# Altium PCB PCB_Testplatine - GND mit Tracks.PcbDoc (part 1 of 4)
Units mm, origin at the board's own origin, x right, y up, seen from the top; angles counter-clockwise.
Board outline 124.77 x 137.35 mm, 2 copper layers (Top Layer, Bottom Layer); 214 components, 181 nets, 1100 pads, 464 vias.
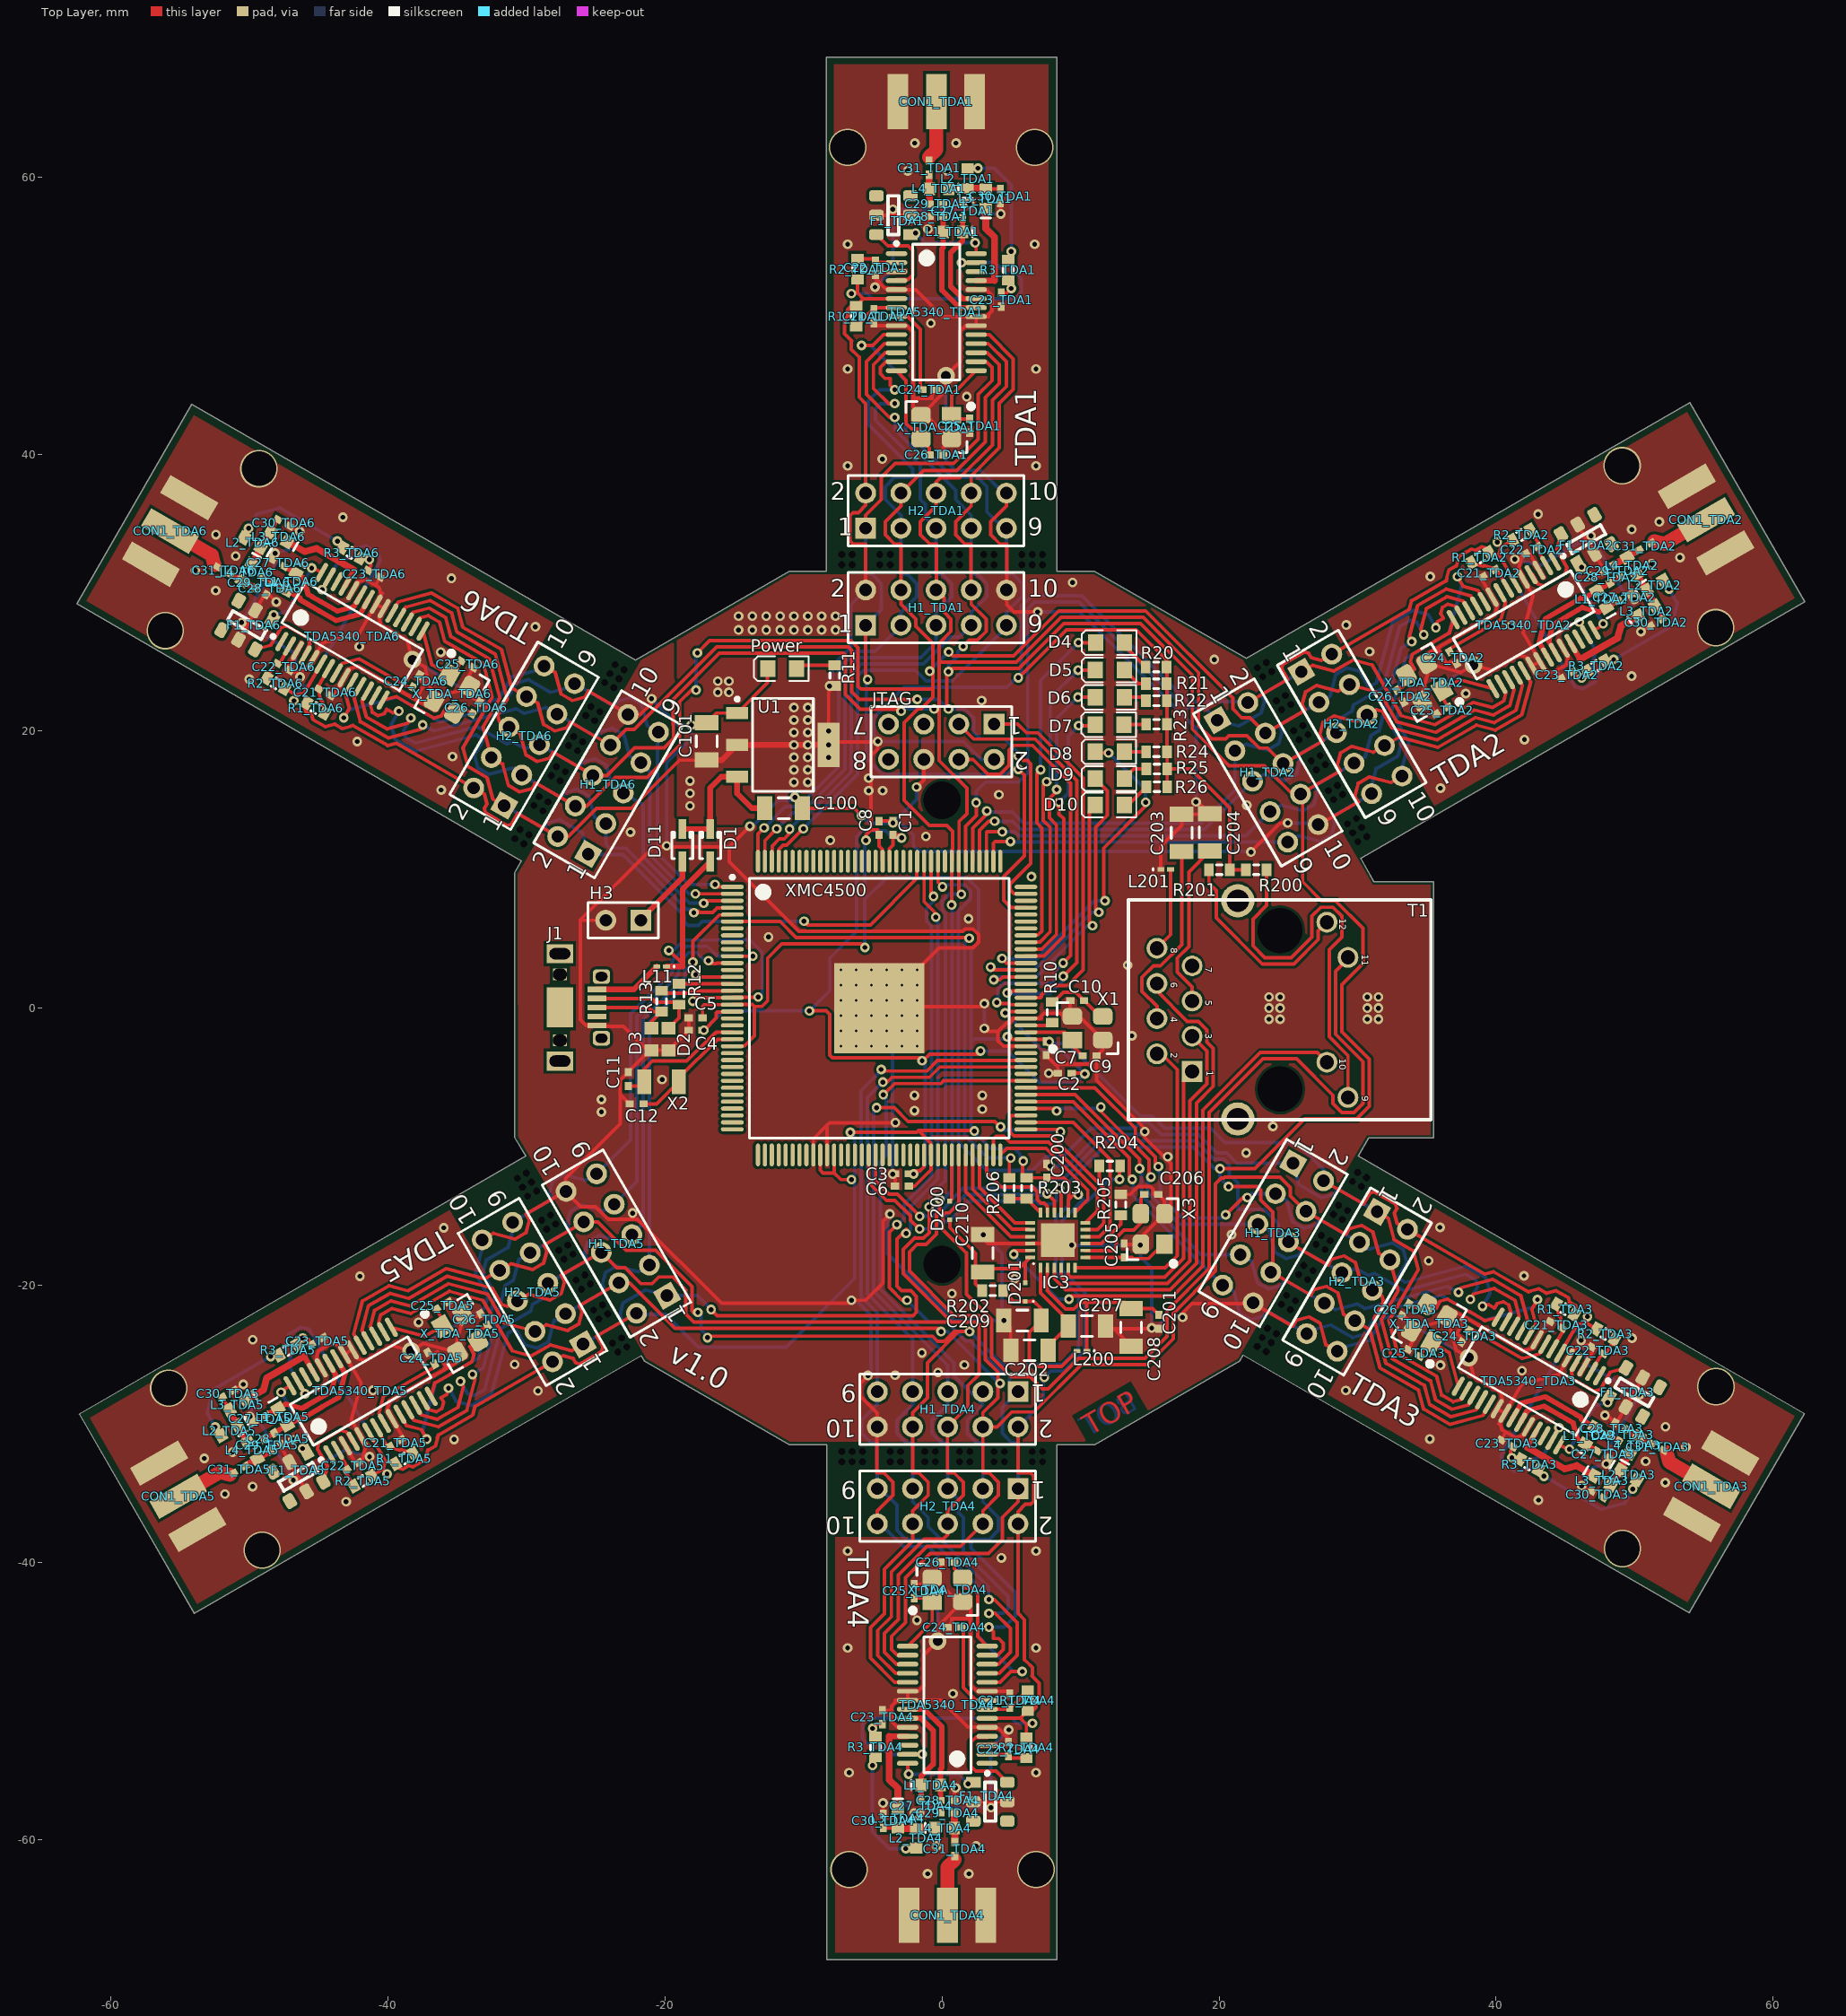
[diagram p0: Top Layer view]
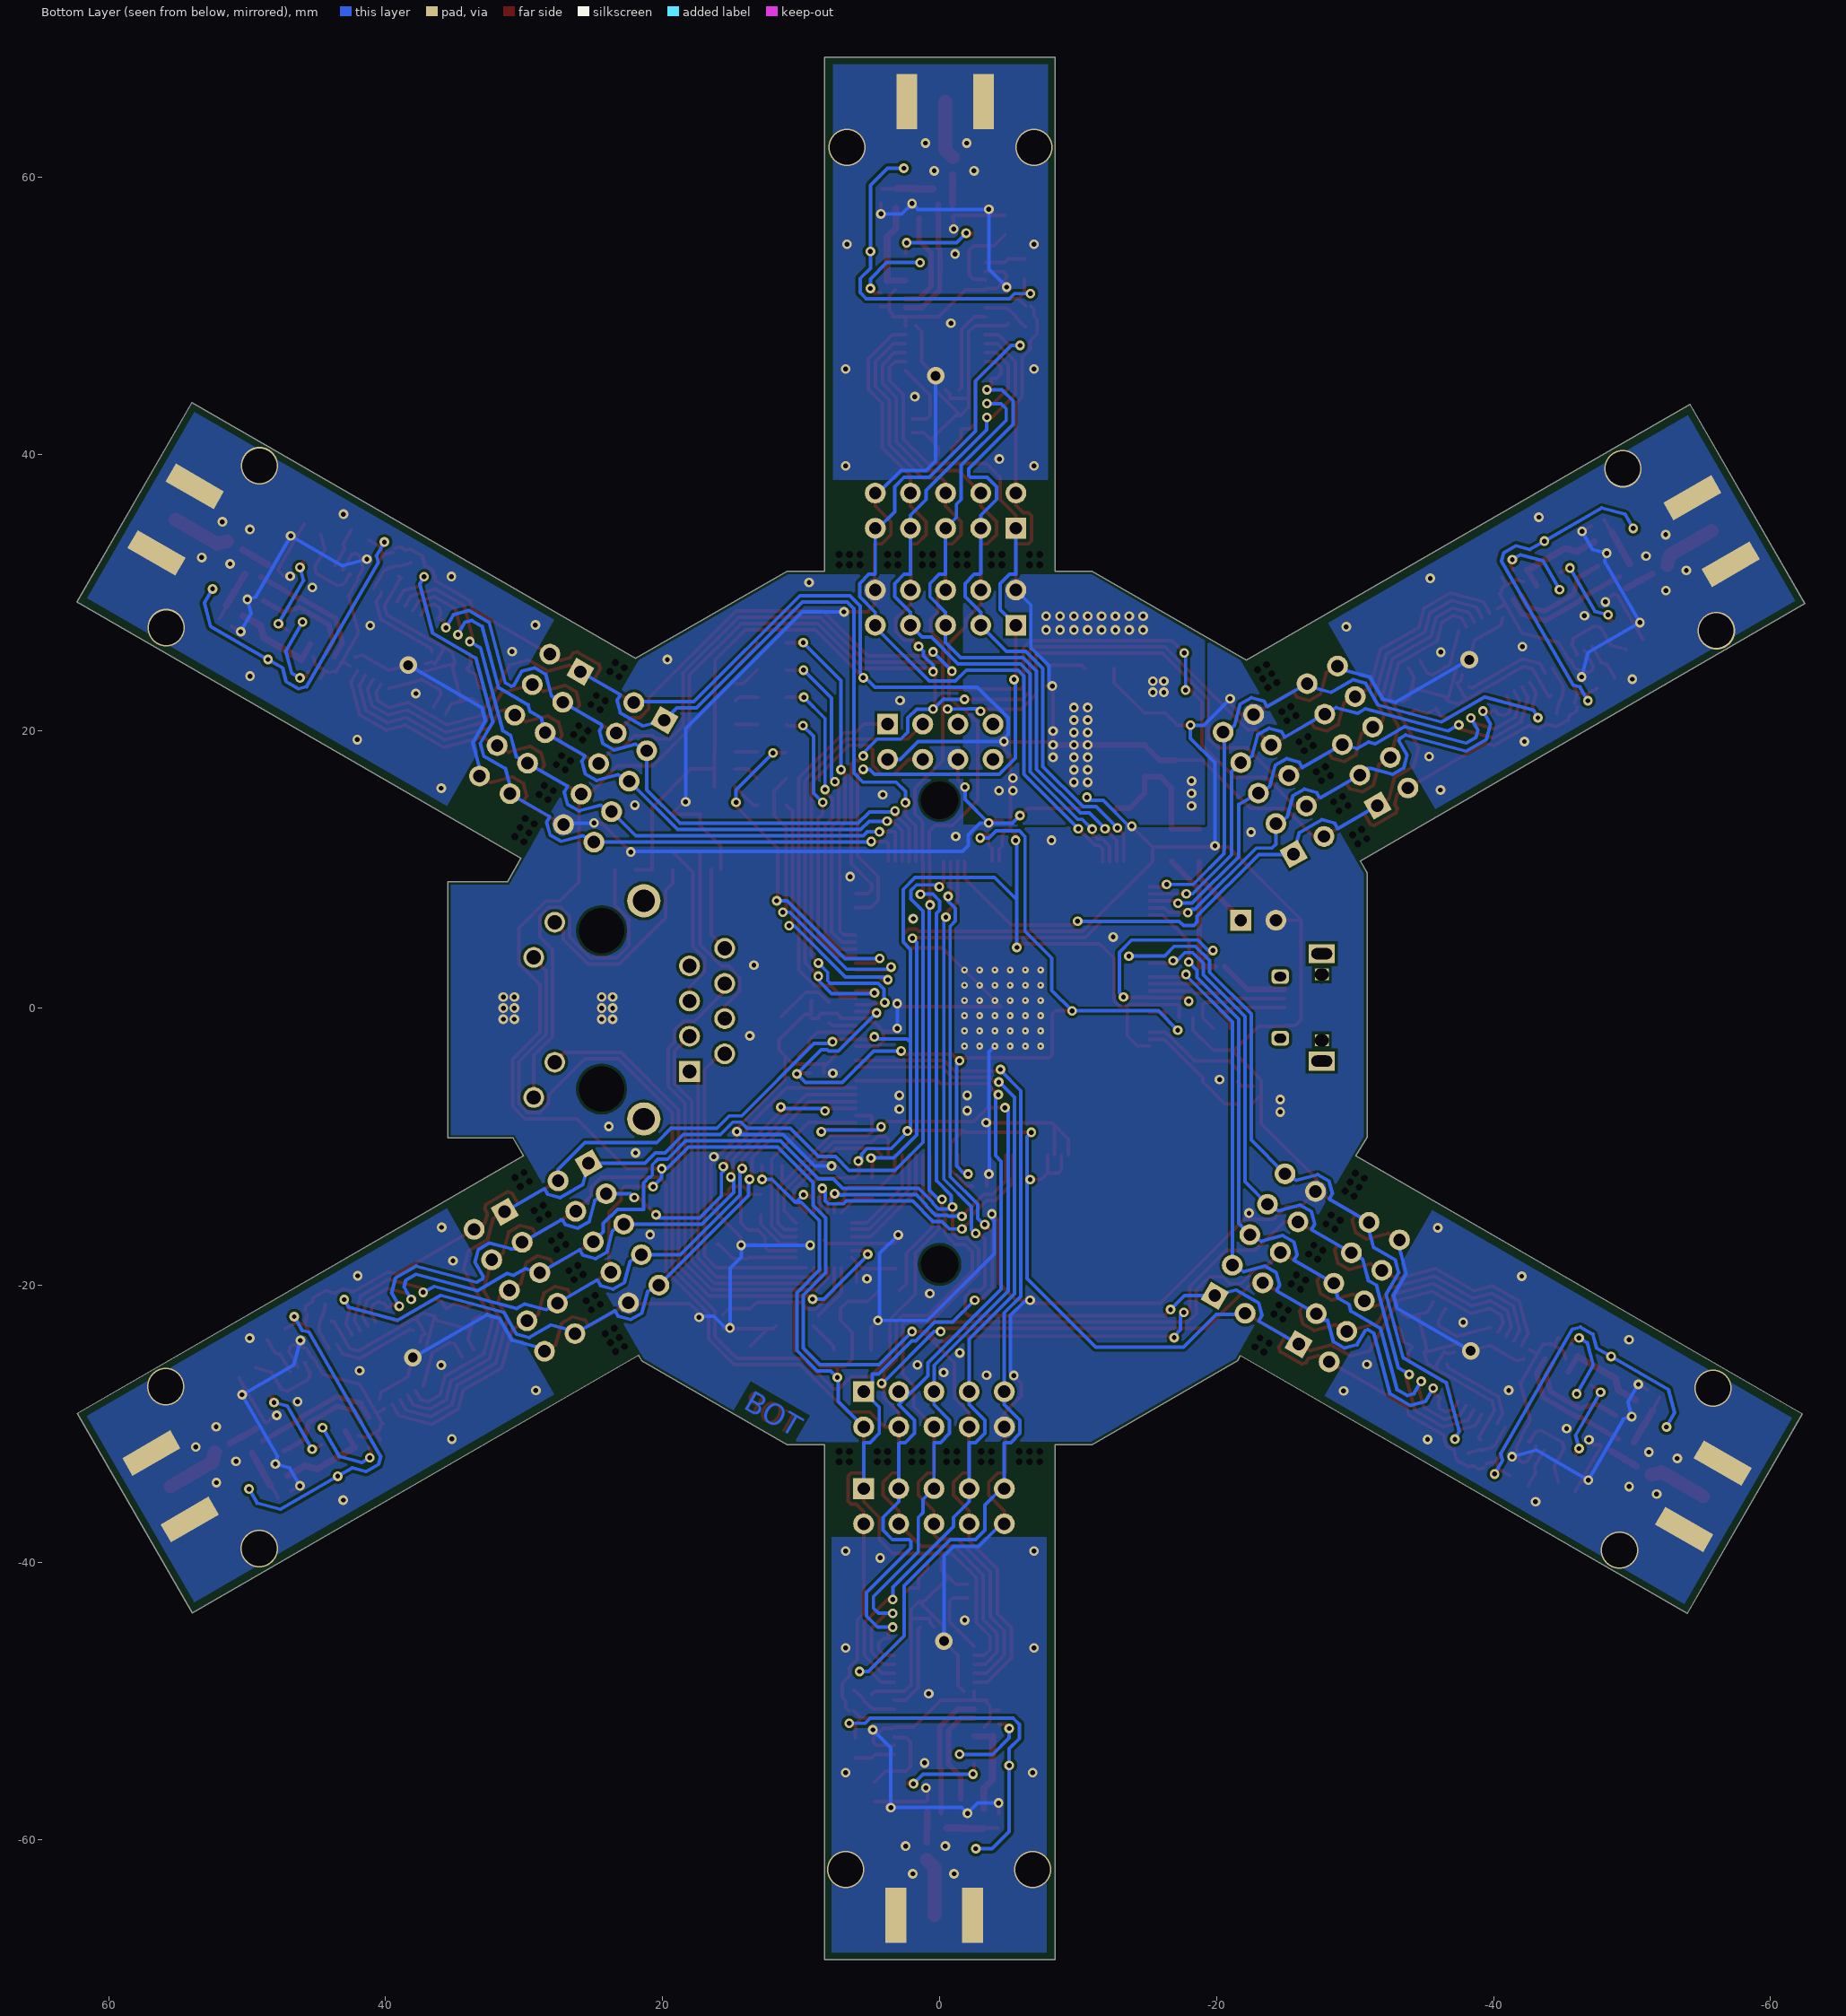
[diagram p1: Bottom Layer view, seen from below]

## Layer stack, top to bottom
Top Solder: solder mask 0.0102, Solder Resist, Dk 3.5
Top Layer: signal copper 0.0356
Dielectric1: dielectric 0.32, FR-4, Dk 4.8
Bottom Layer: signal copper 0.0356
Bottom Solder: solder mask 0.0102, Solder Resist, Dk 3.5

## Board outline
-8.33,-68.7 8.29,-68.7 8.29,-31.51 8.31,-31.51 11.02,-31.51 21.5,-25.46 21.73,-25.06 53.95,-43.66 62.26,-29.27 30.04,-10.67 30.79,-9.37 35.49,-9.37 35.49,9.12 35.01,9.12 31.19,9.12 30.22,10.81 62.29,29.33 53.98,43.72 21.95,25.25 11,31.53 8.29,31.53 8.29,68.65 8.04,68.65 -8.35,68.65 -8.35,31.55 -8.35,31.53 -11.02,31.53 -22.15,25.11 -54.18,43.59 -62.48,29.19 -30.38,10.62 -30.88,9.75 -30.88,-9.32 -30.05,-10.67 -62.3,-29.3 -53.99,-43.7 -21.73,-25.09 -21.52,-25.46 -11.02,-31.51 -8.33,-31.51

## Design rules (kind name [scope] priority, off if disabled: settings)
BoardOutlineClearance [All] p1: gap=0.2
Clearance [All] p1: gap=0.2
DiffPairsRouting [All] p1: maxlimit=0.254 minlimit=0.254 mostfreqgap=0.254 toplayer_minwidth=0.381 toplayer_maxwidth=0.381 toplayer_prefwidth=0.381 bottomlayer_minwidth=0.381 bottomlayer_maxwidth=0.381 bottomlayer_prefwidth=0.381 maxuncoupledlength=12.7
FabricationTestPointUsage TestPointUsage [All] p1: valid=0 allowmultiple=FALSE
FabricationTestpoint Testpoint [All] p1: side=3 testpointundercomponent=TRUE minsize=1.016 maxsize=2.54 preferedsize=1.524 minholesize=0 maxholesize=1.016 preferedholesize=0.813 testpointgrid=0.025 allowsidetop=TRUE allowsidebottom=TRUE usegrid=TRUE gridtolerance=0
HoleSize [All] p1: absolutevalues=TRUE maxlimit=3.5 minlimit=0.025 maxpercent=80.000 minpercent=20.000
PolygonConnect [isVia] p1: connectstyle=Direct reliefconductorwidth=0.254 reliefentries=4 polygonreliefangle="90 Angle" airgapwidth=0.254
PolygonConnect PolygonConnect_1 [All] p2: connectstyle=Relief reliefconductorwidth=0.254 reliefentries=4 polygonreliefangle="90 Angle" airgapwidth=0.12
RoomDefinition TDA6 [InComponentClass('TDA6')] p1: confinementstyle=ConfineIn formatcopy=TRUE lockcomponents=FALSE outline -25.661,7.946 -17.361,22.322 -54.167,43.572 -62.467,29.196
RoomDefinition TDA5 [InComponentClass('TDA5')] p2: confinementstyle=ConfineIn formatcopy=TRUE lockcomponents=FALSE outline -17.171,-22.435 -25.471,-8.059 -62.277,-29.309 -53.977,-43.685
RoomDefinition TDA4 [InComponentClass('TDA4')] p3: confinementstyle=ConfineIn formatcopy=TRUE lockcomponents=FALSE outline 8.28,-26.19 -8.32,-26.19 -8.32,-68.69 8.28,-68.69
RoomDefinition TDA3 [InComponentClass('TDA3')] p4: confinementstyle=ConfineIn formatcopy=TRUE lockcomponents=FALSE outline 25.441,-8.026 17.141,-22.402 53.947,-43.652 62.247,-29.276
RoomDefinition TDA2 [InComponentClass('TDA2')] p5: confinementstyle=ConfineIn formatcopy=TRUE lockcomponents=FALSE outline 17.171,22.454 25.471,8.078 62.277,29.328 53.977,43.704
RoomDefinition TDA1 [InComponentClass('TDA1')] p6: confinementstyle=ConfineIn formatcopy=TRUE lockcomponents=FALSE outline -8.32,26.14 8.28,26.14 8.28,68.64 -8.32,68.64
RoutingVias [All] p1: holewidth=0.35 width=0.7 viastyle="Through Hole" minholewidth=0.35 minwidth=0.7 maxholewidth=0.711 maxwidth=1.27
SilkToSolderMaskClearance SilkscreenOverComponentPads [IsPad] p1: minsilkscreentomaskgap=0.254 clearancetoexposedcopper=TRUE
SolderMaskExpansion [All] p1: expansion=0.102
Width [All] p1: maxlimit=1 minlimit=0.254 preferedwidth=0.254
25 further rules are at their usual default settings.

## Classes and differential pairs
component class TDA1: C21_TDA1 C22_TDA1 C23_TDA1 C24_TDA1 C25_TDA1 C26_TDA1 C27_TDA1 C28_TDA1 C29_TDA1 C30_TDA1 C31_TDA1 CON1_TDA1 F1_TDA1 H1_TDA1 H2_TDA1 L1_TDA1 L2_TDA1 L3_TDA1 L4_TDA1 R1_TDA1 R2_TDA1 R3_TDA1 TDA5340_TDA1 X_TDA_TDA1
component class TDA2: C21_TDA2 C22_TDA2 C23_TDA2 C24_TDA2 C25_TDA2 C26_TDA2 C27_TDA2 C28_TDA2 C29_TDA2 C30_TDA2 C31_TDA2 CON1_TDA2 F1_TDA2 H1_TDA2 H2_TDA2 L1_TDA2 L2_TDA2 L3_TDA2 L4_TDA2 R1_TDA2 R2_TDA2 R3_TDA2 TDA5340_TDA2 X_TDA_TDA2
component class TDA3: C21_TDA3 C22_TDA3 C23_TDA3 C24_TDA3 C25_TDA3 C26_TDA3 C27_TDA3 C28_TDA3 C29_TDA3 C30_TDA3 C31_TDA3 CON1_TDA3 F1_TDA3 H1_TDA3 H2_TDA3 L1_TDA3 L2_TDA3 L3_TDA3 L4_TDA3 R1_TDA3 R2_TDA3 R3_TDA3 TDA5340_TDA3 X_TDA_TDA3
component class TDA4: C21_TDA4 C22_TDA4 C23_TDA4 C24_TDA4 C25_TDA4 C26_TDA4 C27_TDA4 C28_TDA4 C29_TDA4 C30_TDA4 C31_TDA4 CON1_TDA4 F1_TDA4 H1_TDA4 H2_TDA4 L1_TDA4 L2_TDA4 L3_TDA4 L4_TDA4 R1_TDA4 R2_TDA4 R3_TDA4 TDA5340_TDA4 X_TDA_TDA4
component class TDA5: C21_TDA5 C22_TDA5 C23_TDA5 C24_TDA5 C25_TDA5 C26_TDA5 C27_TDA5 C28_TDA5 C29_TDA5 C30_TDA5 C31_TDA5 CON1_TDA5 F1_TDA5 H1_TDA5 H2_TDA5 L1_TDA5 L2_TDA5 L3_TDA5 L4_TDA5 R1_TDA5 R2_TDA5 R3_TDA5 TDA5340_TDA5 X_TDA_TDA5
component class TDA6: C21_TDA6 C22_TDA6 C23_TDA6 C24_TDA6 C25_TDA6 C26_TDA6 C27_TDA6 C28_TDA6 C29_TDA6 C30_TDA6 C31_TDA6 CON1_TDA6 F1_TDA6 H1_TDA6 H2_TDA6 L1_TDA6 L2_TDA6 L3_TDA6 L4_TDA6 R1_TDA6 R2_TDA6 R3_TDA6 TDA5340_TDA6 X_TDA_TDA6
component class U_Ethernet: C200 C201 C202 C203 C204 C205 C206 C207 C208 C209 C210 D200 D201 IC3 L200 L201 R200 R201 R202 R203 R204 R205 R206 T1 X3
component class "U_Power Supply": C1 C2 C3 C4 C5 C6 C7 C8 C9 C10 C11 C12 C100 C101 D1 D2 D3 D11 H3 J1 JTAG L11 Power R10 R11 R12 R13 U1 X1 X2
component class U_XMC4500: D4 D5 D6 D7 D8 D9 D10 R20 R21 R22 R23 R24 R25 R26 XMC4500
net class P_ON[1..6]: P_ON1 P_ON2 P_ON3 P_ON4 P_ON5 P_ON6
net class SELECT[1..6]: SELECT1 SELECT2 SELECT3 SELECT4 SELECT5 SELECT6
channel class TDA5340: TDA1 TDA2 TDA3 TDA4 TDA5 TDA6
differential pair RX_TDA6: +RX_TDA6_P -RX_TDA6_N
differential pair RX_TDA5: +RX_TDA5_P -RX_TDA5_N
differential pair RX_TDA4: +RX_TDA4_P -RX_TDA4_N
differential pair RX_TDA3: +RX_TDA3_P -RX_TDA3_N
differential pair RX_TDA2: +RX_TDA2_P -RX_TDA2_N
differential pair RX_TDA1: +RX_TDA1_P -RX_TDA1_N

## Components (designator, comment, footprint, x,y, rotation, side; value= is the part's Value field where it differs from the comment)
C1 "Cap Semi" 0402 -3.55,13 r270 top
C2 "Cap Semi" 0402 8.85,-4.7 r0 top
C3 "Cap Semi" 0402 -2.9,-11.95 r0 top
C4 "Cap Semi" 0402 -17.8,-1.6 r0 top
C5 "Cap Semi" 0402 -17.8,-0.7 r0 top
C6 "Cap Semi" 0402 -2.9,-12.85 r0 top
C7 "Cap Semi" 0402 7.5,-2.9 r90 top
C8 "Cap Semi" 0402 -4.55,13 r270 top
C9 "Cap Semi" 0402 10.65,-3.45 r180 top
C10 "Cap Semi" 0402 9.75,0.55 r0 top
C11 "Cap Semi" 0402 -22.66,-5.13 r270 top
C12 "Cap Semi" 0402 -22.06,-6.91 r0 top
C21_TDA1 "Cap Semi" 0402 -4.92,49.94 r270 top (schematic designator C21)
C21_TDA2 "Cap Semi" 0402 39.483,31.409 r210 top (schematic designator C21)
C21_TDA3 "Cap Semi" 0402 44.352,-22.871 r150 top (schematic designator C21)
C21_TDA4 "Cap Semi" 0402 4.88,-49.99 r90 top (schematic designator C21)
C21_TDA5 "Cap Semi" 0402 -39.482,-31.39 r30 top (schematic designator C21)
C21_TDA6 "Cap Semi" 0402 -44.572,22.791 r330 top (schematic designator C21)
C22_TDA1 "Cap Semi" 0402 -4.82,53.44 r270 top (schematic designator C22)
C22_TDA2 "Cap Semi" 0402 42.564,33.073 r210 top (schematic designator C22)
C22_TDA3 "Cap Semi" 0402 47.333,-24.707 r150 top (schematic designator C22)
C22_TDA4 "Cap Semi" 0402 4.78,-53.49 r90 top (schematic designator C22)
C22_TDA5 "Cap Semi" 0402 -42.563,-33.054 r30 top (schematic designator C22)
C22_TDA6 "Cap Semi" 0402 -47.553,24.627 r330 top (schematic designator C22)
C23_TDA1 "Cap Semi" 0402 4.27,51.14 r270 top (schematic designator C23)
C23_TDA2 "Cap Semi" 0402 45.117,24.05 r210 top (schematic designator C23)
C23_TDA3 "Cap Semi" 0402 40.797,-31.43 r150 top (schematic designator C23)
C23_TDA4 "Cap Semi" 0402 -4.31,-51.19 r90 top (schematic designator C23)
C23_TDA5 "Cap Semi" 0402 -45.117,-24.032 r30 top (schematic designator C23)
C23_TDA6 "Cap Semi" 0402 -41.017,31.35 r330 top (schematic designator C23)
C24_TDA1 "Cap Semi" 0402 -0.92,44.64 r0 top (schematic designator C24)
C24_TDA2 "Cap Semi" 0402 36.893,25.295 r300 top (schematic designator C24)
C24_TDA3 "Cap Semi" 0402 37.762,-23.685 r240 top (schematic designator C24)
C24_TDA4 "Cap Semi" 0402 0.88,-44.69 r180 top (schematic designator C24)
C24_TDA5 "Cap Semi" 0402 -36.892,-25.276 r120 top (schematic designator C24)
C24_TDA6 "Cap Semi" 0402 -37.982,23.605 r60 top (schematic designator C24)
C25_TDA1 "Cap Semi" 0402 1.98,42.04 r270 top (schematic designator C25)
C25_TDA2 "Cap Semi" 0402 36.091,21.484 r210 top (schematic designator C25)
C25_TDA3 "Cap Semi" 0402 34.061,-24.896 r150 top (schematic designator C25)
C25_TDA4 "Cap Semi" 0402 -2.02,-42.09 r90 top (schematic designator C25)
C25_TDA5 "Cap Semi" 0402 -36.091,-21.465 r30 top (schematic designator C25)
C25_TDA6 "Cap Semi" 0402 -34.281,24.816 r330 top (schematic designator C25)
C26_TDA1 "Cap Semi" 0402 -0.42,39.94 r180 top (schematic designator C26)
C26_TDA2 "Cap Semi" 0402 33.072,22.512 r120 top (schematic designator C26)
C26_TDA3 "Cap Semi" 0402 33.442,-21.768 r60 top (schematic designator C26)
C26_TDA4 "Cap Semi" 0402 0.38,-39.99 r0 top (schematic designator C26)
C26_TDA5 "Cap Semi" 0402 -33.072,-22.493 r300 top (schematic designator C26)
C26_TDA6 "Cap Semi" 0402 -33.662,21.688 r240 top (schematic designator C26)
C27_TDA1 "Cap Semi" 0402 1.48,57.54 r270 top (schematic designator C27)
C27_TDA2 "Cap Semi" 0402 49.264,29.667 r210 top (schematic designator C27)
C27_TDA3 "Cap Semi" 0402 47.734,-32.213 r150 top (schematic designator C27)
C27_TDA4 "Cap Semi" 0402 -1.52,-57.59 r90 top (schematic designator C27)
C27_TDA5 "Cap Semi" 0402 -49.264,-29.648 r30 top (schematic designator C27)
C27_TDA6 "Cap Semi" 0402 -47.954,32.133 r330 top (schematic designator C27)
C28_TDA1 "Cap Semi" 0402 -0.42,57.14 r180 top (schematic designator C28)
C28_TDA2 "Cap Semi" 0402 47.968,31.112 r120 top (schematic designator C28)
C28_TDA3 "Cap Semi" 0402 48.338,-30.368 r60 top (schematic designator C28)
C28_TDA4 "Cap Semi" 0402 0.38,-57.19 r0 top (schematic designator C28)
C28_TDA5 "Cap Semi" 0402 -47.968,-31.093 r300 top (schematic designator C28)
C28_TDA6 "Cap Semi" 0402 -48.558,30.288 r240 top (schematic designator C28)
C29_TDA1 "Cap Semi" 0402 -0.42,58.04 r0 top (schematic designator C29)
C29_TDA2 "Cap Semi" 0402 48.747,31.562 r300 top (schematic designator C29)
C29_TDA3 "Cap Semi" 0402 49.117,-30.818 r240 top (schematic designator C29)
C29_TDA4 "Cap Semi" 0402 0.38,-58.09 r180 top (schematic designator C29)
C29_TDA5 "Cap Semi" 0402 -48.747,-31.543 r120 top (schematic designator C29)
C29_TDA6 "Cap Semi" 0402 -49.337,30.738 r60 top (schematic designator C29)
C30_TDA1 "Cap Semi" 0402 4.2,58.62 r90 top (schematic designator C30)
C30_TDA2 "Cap Semi" 0402 51.56,27.851 r30 top (schematic designator C30)
C30_TDA3 "Cap Semi" 0402 47.309,-35.109 r330 top (schematic designator C30)
C30_TDA4 "Cap Semi" 0402 -4.24,-58.67 r270 top (schematic designator C30)
C30_TDA5 "Cap Semi" 0402 -51.559,-27.832 r210 top (schematic designator C30)
C30_TDA6 "Cap Semi" 0402 -47.529,35.029 r150 top (schematic designator C30)
C31_TDA1 "Cap Semi" 0402 -0.95,60.66 r90 top (schematic designator C31)
C31_TDA2 "Cap Semi" 0402 50.751,33.331 r30 top (schematic designator C31)
C31_TDA3 "Cap Semi" 0402 51.651,-31.669 r330 top (schematic designator C31)
C31_TDA4 "Cap Semi" 0402 0.91,-60.71 r270 top (schematic designator C31)
C31_TDA5 "Cap Semi" 0402 -50.751,-33.312 r210 top (schematic designator C31)
C31_TDA6 "Cap Semi" 0402 -51.871,31.589 r150 top (schematic designator C31)
C100 "Cap Semi" C1206 -11.45,14.43 r180 top
C101 "Cap Semi" C1206 -17,19.25 r270 top
C200 "Cap Semi" 0402 7.55,-11.75 r270 top
C201 "Cap Semi" 0402 15.65,-22.65 r90 top
C202 "Cap Semi" C1206 6.3,-24.7 r0 top
C203 "Cap Semi" C1206 17.29,12.66 r270 top
C204 "Cap Semi" C1206 19.32,12.68 r270 top
C205 "Cap Semi" 0402 13.15,-17.5 r270 top
C206 "Cap Semi" 0402 15.1,-13.45 r180 top
C207 "Cap Semi" C1206 10.45,-22.95 r180 top
C208 "Cap Semi" C1206 13.65,-23.05 r90 top
C209 "Cap Semi" C1206 5.8,-22.55 r0 top
C210 "Cap Semi" C1206 2.93,-17.7 r270 top
CON1_TDA1 "SMA" SMA -0.42,63.44 r0 top (schematic designator CON1)
CON1_TDA2 "SMA" SMA 53.424,34.262 r300 top (schematic designator CON1)
CON1_TDA3 "SMA" SMA 53.794,-33.518 r240 top (schematic designator CON1)
CON1_TDA4 "SMA" SMA 0.38,-63.49 r180 top (schematic designator CON1)
CON1_TDA5 "SMA" SMA -53.424,-34.243 r120 top (schematic designator CON1)
CON1_TDA6 "SMA" SMA -54.014,33.438 r60 top (schematic designator CON1)
D1 "BAT60A" SOD-323 -16.75,11.75 r90 top
D2 "82356050560" WE-VE_0603 -19.75,-2.25 r90 top
D3 "82356050560" WE-VE_0603 -21,-2.25 r90 top
D4 "Green" LED_0805_Green 12.12,26.38 r180 top
D5 "Green" LED_0805_Green 12.11,24.42 r180 top
D6 "Green" LED_0805_Green 12.1,22.44 r180 top
D7 "Green" LED_0805_Green 12.09,20.47 r180 top
D8 "Red" LED_0805_Red 12.1,18.5 r180 top
D9 "Red" LED_0805_Red 12.11,16.57 r180 top
D10 "Red" LED_0805_Red 12.11,14.65 r180 top
D11 "BAT60A" SOD-323 -18.76,11.75 r90 top
D200 "BAT54-02V" INF-SC79_V 0.55,-14.6 r270 top
D201 "BAT54-02V" INF-SC79_V 6,-20.5 r90 top
F1_TDA1 "SFECF10M7EA00" SOP6 -3.52,57.24 r180 top (schematic designator F1)
F1_TDA2 "SFECF10M7EA00" SOP6 46.505,33.847 r120 top (schematic designator F1)
F1_TDA3 "SFECF10M7EA00" SOP6 49.974,-27.733 r60 top (schematic designator F1)
F1_TDA4 "SFECF10M7EA00" SOP6 3.48,-57.29 r0 top (schematic designator F1)
F1_TDA5 "SFECF10M7EA00" SOP6 -46.504,-33.828 r300 top (schematic designator F1)
F1_TDA6 "SFECF10M7EA00" SOP6 -50.194,27.653 r240 top (schematic designator F1)
H1_TDA1 "Header 5X2" HDR2X5 -5.52,27.64 r0 top (schematic designator H1)
H1_TDA2 "Header 5X2" HDR2X5 19.87,20.779 r300 top (schematic designator H1)
H1_TDA3 "Header 5X2" HDR2X5 25.34,-11.201 r240 top (schematic designator H1)
H1_TDA4 "Header 5X2" HDR2X5 5.48,-27.69 r180 top (schematic designator H1)
H1_TDA5 "Header 5X2" HDR2X5 -19.87,-20.76 r120 top (schematic designator H1)
H1_TDA6 "Header 5X2" HDR2X5 -25.56,11.121 r60 top (schematic designator H1)
H2_TDA1 "Header 5X2" HDR2X5 -5.52,34.64 r0 top (schematic designator H2)
H2_TDA2 "Header 5X2" HDR2X5 25.932,24.279 r300 top (schematic designator H2)
H2_TDA3 "Header 5X2" HDR2X5 31.402,-14.701 r240 top (schematic designator H2)
H2_TDA4 "Header 5X2" HDR2X5 5.48,-34.69 r180 top (schematic designator H2)
H2_TDA5 "Header 5X2" HDR2X5 -25.932,-24.26 r120 top (schematic designator H2)
H2_TDA6 "Header 5X2" HDR2X5 -31.622,14.621 r60 top (schematic designator H2)
H3 "Header 2" HDR1X2 -21.75,6.34 r180 top
IC3 "KSZ8031RNL" "QFN /MLF 24pin" 10.35,-18.75 r90 top
J1 "Micro USB Buchse" "Micro USB Buchse - Molex" -27.6,0.05 r0 top
JTAG "Header 4X2" HDR2X4 3.75,20.5 r180 top
L1_TDA1 "Inductor" INDC1608L 0.78,56.04 r180 top (schematic designator L1)
L1_TDA2 "Inductor" INDC1608L 47.615,29.523 r120 top (schematic designator L1)
L1_TDA3 "Inductor" INDC1608L 46.785,-30.857 r60 top (schematic designator L1)
L1_TDA4 "Inductor" INDC1608L -0.82,-56.09 r0 top (schematic designator L1)
L1_TDA5 "Inductor" INDC1608L -47.615,-29.504 r300 top (schematic designator L1)
L1_TDA6 "Inductor" INDC1608L -47.005,30.777 r240 top (schematic designator L1)
L2_TDA1 "Inductor" INDC1608L 1.84,59.87 r90 top (schematic designator L2)
L2_TDA2 "Inductor" INDC1608L 51.462,30.52 r30 top (schematic designator L2)
L2_TDA3 "Inductor" INDC1608L 49.572,-33.69 r330 top (schematic designator L2)
L2_TDA4 "Inductor" INDC1608L -1.88,-59.92 r270 top (schematic designator L2)
L2_TDA5 "Inductor" INDC1608L -51.462,-30.501 r210 top (schematic designator L2)
L2_TDA6 "Inductor" INDC1608L -49.792,33.61 r150 top (schematic designator L2)
L3_TDA1 "Inductor" INDC1608L 3.15,58.43 r90 top (schematic designator L3)
L3_TDA2 "Inductor" INDC1608L 50.87,28.665 r30 top (schematic designator L3)
L3_TDA3 "Inductor" INDC1608L 47.67,-34.105 r330 top (schematic designator L3)
L3_TDA4 "Inductor" INDC1608L -3.19,-58.48 r270 top (schematic designator L3)
L3_TDA5 "Inductor" INDC1608L -50.87,-28.647 r210 top (schematic designator L3)
L3_TDA6 "Inductor" INDC1608L -47.89,34.025 r150 top (schematic designator L3)
L4_TDA1 "Inductor" INDC1608L -0.22,59.14 r180 top (schematic designator L4)
L4_TDA2 "Inductor" INDC1608L 49.8,31.939 r120 top (schematic designator L4)
L4_TDA3 "Inductor" INDC1608L 49.97,-31.541 r60 top (schematic designator L4)
L4_TDA4 "Inductor" INDC1608L 0.18,-59.19 r0 top (schematic designator L4)
L4_TDA5 "Inductor" INDC1608L -49.8,-31.92 r300 top (schematic designator L4)
L4_TDA6 "Inductor" INDC1608L -50.19,31.461 r240 top (schematic designator L4)
L11 "Inductor" 0603 -20.25,3 r180 top
L200 "Inductor" 0603 10.1,-24.75 r180 top
L201 "Inductor" 0603 16.14,10.01 r0 top
Power "Red" LED_0805_Red -11.55,24.5 r180 top
R1_TDA1 "Res3" J1-0603 -6.22,49.94 r90 top (schematic designator R1)
R1_TDA2 "Res3" J1-0603 38.833,32.535 r30 top (schematic designator R1)
R1_TDA3 "Res3" J1-0603 45.002,-21.745 r330 top (schematic designator R1)
R1_TDA4 "Res3" J1-0603 6.18,-49.99 r270 top (schematic designator R1)
R1_TDA5 "Res3" J1-0603 -38.832,-32.516 r210 top (schematic designator R1)
R1_TDA6 "Res3" J1-0603 -45.222,21.665 r150 top (schematic designator R1)
R2_TDA1 "Res3" J1-0603 -6.12,53.34 r270 top (schematic designator R2)
R2_TDA2 "Res3" J1-0603 41.827,34.148 r210 top (schematic designator R2)
R2_TDA3 "Res3" J1-0603 47.897,-23.532 r150 top (schematic designator R2)
R2_TDA4 "Res3" J1-0603 6.08,-53.39 r90 top (schematic designator R2)
R2_TDA5 "Res3" J1-0603 -41.827,-34.13 r30 top (schematic designator R2)
R2_TDA6 "Res3" J1-0603 -48.117,23.452 r330 top (schematic designator R2)
R3_TDA1 "Res3" J1-0603 4.77,53.29 r90 top (schematic designator R3)
R3_TDA2 "Res3" J1-0603 47.229,24.692 r30 top (schematic designator R3)
R3_TDA3 "Res3" J1-0603 42.409,-32.938 r330 top (schematic designator R3)
R3_TDA4 "Res3" J1-0603 -4.81,-53.34 r270 top (schematic designator R3)
R3_TDA5 "Res3" J1-0603 -47.229,-24.674 r210 top (schematic designator R3)
R3_TDA6 "Res3" J1-0603 -42.629,32.858 r150 top (schematic designator R3)
R10 "Res3" J1-0603 7.95,-0.3 r90 top
R11 "Res3" J1-0603 -7.75,24 r270 top
R12 "Res3" J1-0603 -19,1 r270 top
R13 "Res3" J1-0603 -20.25,0.5 r270 top
R20 "Res3" J1-0603 15.45,24.63 r0 top
R21 "Res3" J1-0603 15.46,23.41 r0 top
R22 "Res3" J1-0603 15.47,22.19 r0 top
R23 "Res3" J1-0603 15.48,20.49 r0 top
R24 "Res3" J1-0603 15.48,18.51 r0 top
R25 "Res3" J1-0603 15.5,17.26 r0 top
R26 "Res3" J1-0603 15.5,15.98 r0 top
R200 "Res3" J1-0603 22.68,9.99 r180 top
R201 "Res3" J1-0603 20.01,9.99 r0 top
R202 "Res3" J1-0603 3.65,-20.4 r0 top
R203 "Res3" J1-0603 6.1,-13 r90 top
R204 "Res3" J1-0603 12.1,-11.4 r0 top
R205 "Res3" J1-0603 12.9,-14.2 r270 top
R206 "Res3" J1-0603 4.85,-13 r90 top
T1 "7499010211A" 7499010211A 24.4,-0.125 r270 top
TDA5340_TDA1 "TDA5340" INF-PG-TSSOP-28_N -0.42,50.24 r0 top (schematic designator TDA5340)
TDA5340_TDA2 "TDA5340" INF-PG-TSSOP-28_N 41.992,27.662 r300 top (schematic designator TDA5340)
TDA5340_TDA3 "TDA5340" INF-PG-TSSOP-28_N 42.362,-26.918 r240 top (schematic designator TDA5340)
TDA5340_TDA4 "TDA5340" INF-PG-TSSOP-28_N 0.38,-50.29 r180 top (schematic designator TDA5340)
TDA5340_TDA5 "TDA5340" INF-PG-TSSOP-28_N -41.992,-27.643 r120 top (schematic designator TDA5340)
TDA5340_TDA6 "TDA5340" INF-PG-TSSOP-28_N -42.582,26.838 r60 top (schematic designator TDA5340)
U1 "IFX1117ME V33" INF-PG-SOT223_SC-73_N -11.5,19 r0 top
X1 "Quarz" Quarz 10.5,-1.45 r0 top
X2 "RTC Crystal" "RTC Uhrenquarz  1.5x3.2 SMD" -20.27,-5.32 r0 top
X3 "25MHz" Quarz 15.2,-15.95 r90 top
X_TDA_TDA1 "Quarz" Quarz -0.42,41.94 r180 top (schematic designator X_TDA)
X_TDA_TDA2 "Quarz" Quarz 34.804,23.512 r120 top (schematic designator X_TDA)
X_TDA_TDA3 "Quarz" Quarz 35.174,-22.768 r60 top (schematic designator X_TDA)
X_TDA_TDA4 "Quarz" Quarz 0.38,-41.99 r0 top (schematic designator X_TDA)
X_TDA_TDA5 "Quarz" Quarz -34.804,-23.493 r300 top (schematic designator X_TDA)
X_TDA_TDA6 "Quarz" Quarz -35.394,22.688 r240 top (schematic designator X_TDA)
XMC4500 "XMC4500-F144K1024 AB" INF-PG-LQFP-144-18-6500X6500TP_N -4.55,0 r0 top

## Footprints (in the part's own frame and the unit in brackets; to place one, negate y for a bottom-side part, rotate by r counter-clockwise, add the part's x,y. Pads: shape width x height; smd on the part's side, far side on the other; paste and mask are expansions set on the pad)
0402 [mm] "Chip Capacitor, Body 1.0x0.5mm, IPC High Density"
  rect 0.6x0.5 smd: 1(-0.5,0) 2(0.5,0)
  body extent -0.55,-0.3 0.55,0.3, height 1.3
0603 [mm] "Chip Inductor, Body 0.6x0.3mm, IPC High Density"
  rect 0.5x0.3 smd: 1(-0.35,0) 2(0.35,0)
  silkscreen extent -0.9,-0.05 -0.9,0.05, body extent -0.33,-0.18 0.33,0.18, height 0.55
7499010211A [mm] "RJ45 LAN Transformer, 10/100 Base-T"
  rect 1.5x1.5 hole 1.02: 1(4.445,-6.35)
  round 1.5 hole 1.02: 2(3.175,-8.89) 3(1.905,-6.35) 4(0.635,-8.89) 5(-0.635,-6.35) 6(-1.905,-8.89) 7(-3.175,-6.35) 8(-4.445,-8.89) 9(6.325,4.9) 10(3.785,3.38) 11(-3.785,4.9) 12(-6.325,3.38)
  round 2.4 hole 1.6: ""(-7.875,-3.05) ""(7.875,-3.05)
  round 0 hole 3.25 unplated: ""(-5.715,0) ""(5.715,0)
  silkscreen extent -7.94,-10.95 7.94,10.89, body extent -7.94,-10.95 7.94,10.89, height 13.45
C1206 [mm] "Chip Capacitor, Body 3.2x1.6mm, IPC High Density"
  rect 1.1x1.7 smd: 1(-1.35,0) 2(1.35,0)
  silkscreen extent -0.4,-0.75 0.4,0.75, body extent -1.7,-0.9 1.7,0.9, height 1.3
HDR1X2 [mm] "Connector; Header; 2 Position"
  rect 1.5x1.5 hole 0.9: 1(0,0)
  round 1.5 hole 0.9: 2(2.54,0)
  silkscreen extent -1.27,-1.27 3.81,1.27
HDR2X4 [mm] "Connector; Header; 4x2 Position"
  rect 1.5x1.5 hole 0.9: 1(0,0)
  round 1.5 hole 0.9: 2(0,2.54) 3(2.54,0) 4(2.54,2.54) 5(5.08,0) 6(5.08,2.54) 7(7.62,0) 8(7.62,2.54)
  silkscreen extent -1.27,-1.27 8.89,3.81
HDR2X5 [mm] "Connector; Header; 5x2 Position"
  rect 1.5x1.5 hole 0.9: 1(0,0)
  round 1.5 hole 0.9: 2(0,2.54) 3(2.54,0) 4(2.54,2.54) 5(5.08,0) 6(5.08,2.54) 7(7.62,0) 8(7.62,2.54) 9(10.16,0) 10(10.16,2.54)
  silkscreen extent -1.27,-1.27 11.43,3.81
INDC1608L [mm] "Chip Inductor, Body 1.6x0.8mm, IPC High Density"
  rect 0.8x0.9 smd: 1(-0.7,0) 2(0.7,0)
  silkscreen extent -1.4,-0.35 -1.4,0.35, body extent -0.87,-0.48 0.87,0.48, height 0.55
INF-PG-LQFP-144-18-6500X6500TP_N [mm] "QFP, 144-Leads, Body 20x20mm, Pitch 0.5mm, Thermal Pad 6.5x6.5mm, IPC Medium Density"
  oval 1.65x0.3 smd: 1(-10.6,8.75) 2(-10.6,8.25) 3(-10.6,7.75) 4(-10.6,7.25) 5(-10.6,6.75) 6(-10.6,6.25) 7(-10.6,5.75) 8(-10.6,5.25) 9(-10.6,4.75) 10(-10.6,4.25) 11(-10.6,3.75) 12(-10.6,3.25) 13(-10.6,2.75) 14(-10.6,2.25) 15(-10.6,1.75) 16(-10.6,1.25) 17(-10.6,0.75) 18(-10.6,0.25) 19(-10.6,-0.25) 20(-10.6,-0.75) 21(-10.6,-1.25) 22(-10.6,-1.75) 23(-10.6,-2.25) 24(-10.6,-2.75) 25(-10.6,-3.25) 26(-10.6,-3.75) 27(-10.6,-4.25) 28(-10.6,-4.75) 29(-10.6,-5.25) 30(-10.6,-5.75) 31(-10.6,-6.25) 32(-10.6,-6.75) 33(-10.6,-7.25) 34(-10.6,-7.75) 35(-10.6,-8.25) 36(-10.6,-8.75) 73(10.6,-8.75) 74(10.6,-8.25) 75(10.6,-7.75) 76(10.6,-7.25) 77(10.6,-6.75) 78(10.6,-6.25) 79(10.6,-5.75) 80(10.6,-5.25) 81(10.6,-4.75) 82(10.6,-4.25) 83(10.6,-3.75) 84(10.6,-3.25) 85(10.6,-2.75) 86(10.6,-2.25) 87(10.6,-1.75) 88(10.6,-1.25) 89(10.6,-0.75) 90(10.6,-0.25) 91(10.6,0.25) 92(10.6,0.75) 93(10.6,1.25) 94(10.6,1.75) 95(10.6,2.25) 96(10.6,2.75) 97(10.6,3.25) 98(10.6,3.75) 99(10.6,4.25) 100(10.6,4.75) 101(10.6,5.25) 102(10.6,5.75) 103(10.6,6.25) 104(10.6,6.75) 105(10.6,7.25) 106(10.6,7.75) 107(10.6,8.25) 108(10.6,8.75)
  oval 0.3x1.65 smd: 37(-8.75,-10.6) 38(-8.25,-10.6) 39(-7.75,-10.6) 40(-7.25,-10.6) 41(-6.75,-10.6) 42(-6.25,-10.6) 43(-5.75,-10.6) 44(-5.25,-10.6) 45(-4.75,-10.6) 46(-4.25,-10.6) 47(-3.75,-10.6) 48(-3.25,-10.6) 49(-2.75,-10.6) 50(-2.25,-10.6) 51(-1.75,-10.6) 52(-1.25,-10.6) 53(-0.75,-10.6) 54(-0.25,-10.6) 55(0.25,-10.6) 56(0.75,-10.6) 57(1.25,-10.6) 58(1.75,-10.6) 59(2.25,-10.6) 60(2.75,-10.6) 61(3.25,-10.6) 62(3.75,-10.6) 63(4.25,-10.6) 64(4.75,-10.6) 65(5.25,-10.6) 66(5.75,-10.6) 67(6.25,-10.6) 68(6.75,-10.6) 69(7.25,-10.6) 70(7.75,-10.6) 71(8.25,-10.6) 72(8.75,-10.6) 109(8.75,10.6) 110(8.25,10.6) 111(7.75,10.6) 112(7.25,10.6) 113(6.75,10.6) 114(6.25,10.6) 115(5.75,10.6) 116(5.25,10.6) 117(4.75,10.6) 118(4.25,10.6) 119(3.75,10.6) 120(3.25,10.6) 121(2.75,10.6) 122(2.25,10.6) 123(1.75,10.6) 124(1.25,10.6) 125(0.75,10.6) 126(0.25,10.6) 127(-0.25,10.6) 128(-0.75,10.6) 129(-1.25,10.6) 130(-1.75,10.6) 131(-2.25,10.6) 132(-2.75,10.6) 133(-3.25,10.6) 134(-3.75,10.6) 135(-4.25,10.6) 136(-4.75,10.6) 137(-5.25,10.6) 138(-5.75,10.6) 139(-6.25,10.6) 140(-6.75,10.6) 141(-7.25,10.6) 142(-7.75,10.6) 143(-8.25,10.6) 144(-8.75,10.6)
  rect 6.5x6.5 smd: 145(0,0)
  silkscreen extent -10.72,-9.37 9.38,9.57, body extent -10,-10 10,10, height 1.6
INF-PG-SOT223_SC-73_N [mm] "SOT223, 4-Leads, Body 6.5x3.5mm, Pitch 2.3mm, IPC Medium Density"
  rect 1.6x0.9 smd: 1(-3.3,2.3) 2(-3.3,0) 3(-3.3,-2.3)
  rect 1.6x3.2 smd: 4(3.3,0)
  silkscreen extent -3.42,-3.35 2.2,3.42, body extent -1.85,-3.35 1.85,3.35, height 1.8
INF-PG-TSSOP-28_N [mm] "SOP, 28-Leads, Body 9.7x4.4 mm, Pitch 0.65 mm, IPC Medium Density"
  oval 1.55x0.35 smd: 1(-2.875,4.225) 2(-2.875,3.575) 3(-2.875,2.925) 4(-2.875,2.275) 5(-2.875,1.625) 6(-2.875,0.975) 7(-2.875,0.325) 8(-2.875,-0.325) 9(-2.875,-0.975) 10(-2.875,-1.625) 11(-2.875,-2.275) 12(-2.875,-2.925) 13(-2.875,-3.575) 14(-2.875,-4.225) 15(2.875,-4.225) 16(2.875,-3.575) 17(2.875,-2.925) 18(2.875,-2.275) 19(2.875,-1.625) 20(2.875,-0.975) 21(2.875,-0.325) 22(2.875,0.325) 23(2.875,0.975) 24(2.875,1.625) 25(2.875,2.275) 26(2.875,2.925) 27(2.875,3.575) 28(2.875,4.225)
  silkscreen extent -3,-4.9 1.7,5.07, body extent -2.25,-4.9 2.25,4.9, height 1.2
INF-SC79_V [mm] "SC79, 2-Leads, Body 1.2x0.8 mm"
  rect 0.35x0.35 smd: 1(-0.672,0) 2(0.678,0)
  silkscreen extent -0.72,-0.62 -0.62,-0.52, body extent -0.6,-0.4 0.6,0.4, height 0.59
J1-0603 [mm] "Chip Resistor, Body 1.6x0.8mm, IPC High Density"
  rect 0.7x0.9 smd: 1(-0.75,0) 2(0.75,0)
  silkscreen extent -0.2,-0.35 0.2,0.35, body extent -0.85,-0.48 0.85,0.48, height 0.9
LED_0805_Green [mm] "Chip LED, 2-Leads, Body 2.0x1.3mm, IPC Medium Density"
  rect 1.1x1.2 smd: 1(-1.05,0) 2(1.05,0)
  silkscreen extent -1.91,-0.89 2.03,0.89, body extent -1,-0.63 1,0.62, height 0.68
LED_0805_Red [mm] "Chip LED, 2-Leads, Body 2.0x1.3mm, IPC Medium Density"
  rect 1.1x1.2 smd: 1(-1.05,0) 2(1.05,0)
  silkscreen extent -1.91,-0.89 2.03,0.89, body extent -1,-0.63 1,0.62, height 0.68
"Micro USB Buchse - Molex" [mm] "Micro USB Buchse - Molex"
  rect 1.35x0.4 smd: 1(2.675,1.3) 2(2.675,0.65) 3(2.675,0) 4(2.675,-0.65) 5(2.675,-1.3)
  rect 1.9x1.375 hole 0.8 slot 1.5 at 0 deg: SH(0,-3.875) SH(0,3.875)
  rect 1x0.85 hole 0.85 slot 1 at 0 deg: SH(0,-2.375) SH(0,2.375)
  rect 1.9x2.9 smd: SH(0,0)
  rrect50% 1.25x1.05 hole 0.65 slot 0.85 at 0 deg: SH(3,-2.225) SH(3,2.225)
  body extent -2.8,-4.37 3.1,4.28, height 2.67
"QFN /MLF 24pin" [mm]
  rect 0.7x0.25 smd: 1(0,3.25) 2(0,2.75) 3(0,2.25) 4(0,1.75) 5(0,1.25) 6(0,0.75) 13(4,0.75) 14(4,1.25) 15(4,1.75) 16(4,2.25) 17(4,2.75) 18(4,3.25)
  rect 0.25x0.7 smd: 7(0.75,0) 8(1.25,0) 9(1.75,0) 10(2.25,0) 11(2.75,0) 12(3.25,0) 19(3.25,4) 20(2.75,4) 21(2.25,4) 22(1.75,4) 23(1.25,4) 24(0.75,4)
  rect 2.45x2.45 smd: EXP(2,2)
  silkscreen extent 0.29,3.75 0.3,3.75, body extent 0,0 4,4, height 0.85
Quarz [mm] "3.2x2.5x0.8mm"
  rect 1.4x1.2 smd: 1(-1.1,-0.85)
  rrect50% 1.4x1.2 smd: 2(1.1,-0.85) 3(1.1,0.85) 4(-1.1,0.85)
  silkscreen extent -2.6,-1.85 2.2,1.85, body extent -1.6,-1.25 1.6,1.25, height 0.8
"RTC Uhrenquarz  1.5x3.2 SMD" [mm]
  rect 1x1.8 smd: 1(-1.25,0) 2(1.25,0)
  body extent -1.6,-0.75 1.6,0.75, height 0.65
SMA [mm]
  rect 1.5x4 smd: 0(-2.77,2) 0(2.77,2) 1(0,2)
  rect 1.5x4 smd far side: 0(-2.77,2) 0(2.77,2)
SOD-323 [mm] "SOD-323/SC-76; 2 Leads; Body 1.7 x 1.3 mm, (LxW)"
  rect 1.45x0.55 smd: 1(1.175,0) 2(-1.175,0)
  silkscreen extent -0.95,-0.75 0.95,0.75
SOP6 [mm]
  round 0.5 on Top Overlay: 1(-1.8,2.2)
  rect 1.05x0.8 smd: 1(-1.225,1.4)
  rrect50% 1.05x0.8 smd: 2(-1.225,0) 3(-1.225,-1.4) 4(1.225,-1.4) 5(1.225,0) 6(1.225,1.4)
  silkscreen extent -0.38,-1.4 0.38,1.4, body extent -1.55,-1.73 1.55,1.73, height 1.4
WE-VE_0603 [mm] "0603, 2-Leads, Body 1.6x0.8mm, Pitch 1.6mm"
  rect 0.9x1 smd: 1(-0.8,0) 2(0.8,0)
  body extent -0.8,-0.4 0.8,0.4, height 0.87

## Part data
C1 C2 C3 C4 C5 C6 C7 C8 C9 C10 C11 C12 C21_TDA1 C21_TDA2 C21_TDA3 C21_TDA4 C21_TDA5 C21_TDA6 C22_TDA1 C22_TDA2 C22_TDA3 C22_TDA4 C22_TDA5 C22_TDA6 C23_TDA1 C23_TDA2 C23_TDA3 C23_TDA4 C23_TDA5 C23_TDA6 C24_TDA1 C24_TDA2 C24_TDA3 C24_TDA4 C24_TDA5 C24_TDA6 C25_TDA1 C25_TDA2 C25_TDA3 C25_TDA4 C25_TDA5 C25_TDA6 C26_TDA1 C26_TDA2 C26_TDA3 C26_TDA4 C26_TDA5 C26_TDA6 C27_TDA1 C27_TDA2 C27_TDA3 C27_TDA4 C27_TDA5 C27_TDA6 C28_TDA1 C28_TDA2 C28_TDA3 C28_TDA4 C28_TDA5 C28_TDA6 C29_TDA1 C29_TDA2 C29_TDA3 C29_TDA4 C29_TDA5 C29_TDA6 C30_TDA1 C30_TDA2 C30_TDA3 C30_TDA4 C30_TDA5 C30_TDA6 C31_TDA1 C31_TDA2 C31_TDA3 C31_TDA4 C31_TDA5 C31_TDA6 C100 C101 C200 C201 C202 C203 C204 C205 C206 C207 C208 C209 C210: "Capacitor (Semiconductor SIM Model)"
D1 D11: "Silicon AF Schottky Rectifier Diode with Extreme Low VF Drop"
D2 D3: library part "WE-VE 0603, 82356050560", "WE-VE ESD Suppressor, 0603, VDC=5V"
D4 D5 D6 D7: library part "WL-SMCW 0805  150080GS75000", "SMD mono-color Chip LED, WL-SMCW, Green"
D8 D9 D10 Power: library part "WL-SMCW 0805  150080RS75000", "SMD mono-color Chip LED, WL-SMCW, Red"
D200 D201: "Silicon Schottky Diode, SC79, Reel, Green"
H1_TDA1 H1_TDA2 H1_TDA3 H1_TDA4 H1_TDA5 H1_TDA6 H2_TDA1 H2_TDA2 H2_TDA3 H2_TDA4 H2_TDA5 H2_TDA6: "Header, 5-Pin, Dual row"
H3: "Header, 2-Pin"
J1: library part "Micro USB Buchse - Molex"
JTAG: "Header, 4-Pin, Dual row"
R1_TDA1 R1_TDA2 R1_TDA3 R1_TDA4 R1_TDA5 R1_TDA6 R2_TDA1 R2_TDA2 R2_TDA3 R2_TDA4 R2_TDA5 R2_TDA6 R3_TDA1 R3_TDA2 R3_TDA3 R3_TDA4 R3_TDA5 R3_TDA6 R10 R11 R12 R13 R20 R21 R22 R23 R24 R25 R26 R200 R201 R202 R203 R204 R205 R206: "Resistor"
T1: "RJ45 LAN Transformer, 10/100 Base-T"
TDA5340_TDA1 TDA5340_TDA2 TDA5340_TDA3 TDA5340_TDA4 TDA5340_TDA5 TDA5340_TDA6: "High Sensitivity Multi-Channel Transceiver, -40 to 110 degC, PG-TSSOP-28, Green"
U1: "Voltage Regulator, 4.55 to 15 V Operating, 1000 mA, -40 to 125 degC, PG-SOT223 (SC-73), Reel, Green"
X3: library part Quarz
XMC4500: "120 MHz XMC4500 MCU with 1,024 KByte Program Memory, 160 KByte SRAM, 3.3 V, -40 to 125 degC, PG-LQFP-144, Green"

## Free pads (board coordinates)
  round 1 hole 2.7 unplated: Bohrung(0,-18.5) Bohrung(0,15)
  round 0.4 hole 0.5 unplated paste+0 mask+0: Drill(-30.858,12.24) Drill(-30.675,-12.279) Drill(-30.483,12.889) Drill(-30.3,-12.929) Drill(-30.209,11.865) Drill(-30.025,-11.904) Drill(-29.925,-13.578) Drill(-29.834,12.514) Drill(-29.65,-12.554) Drill(-29.483,14.621) Drill(-29.275,-13.203) Drill(-29.108,15.271) Drill(-28.925,-15.31) Drill(-28.834,14.246) Drill(-28.55,-15.96) Drill(-28.459,14.896) Drill(-28.275,-14.935) Drill(-28.233,16.786) Drill(-27.9,-15.585) Drill(-27.858,17.436) Drill(-27.675,-17.475) Drill(-27.584,16.411) Drill(-27.3,-18.125) Drill(-27.209,17.061) Drill(-27.025,-17.1) Drill(-26.983,18.951) Drill(-26.65,-17.75) Drill(-26.608,19.601) Drill(-26.425,-19.641) Drill(-26.334,18.576) Drill(-26.05,-20.29) Drill(-25.959,19.226) Drill(-25.775,-19.266) Drill(-25.733,21.116) Drill(-25.4,-19.915) Drill(-25.358,21.766) Drill(-25.175,-21.806) Drill(-25.084,20.741) Drill(-24.8,-22.455) Drill(-24.709,21.391) Drill(-24.525,-21.431) Drill(-24.358,23.498) Drill(-24.15,-22.08) Drill(-23.983,24.147) Drill(-23.8,-24.187) Drill(-23.709,23.123) Drill(-23.608,24.797) Drill(-23.425,-24.837) Drill(-23.334,23.772) Drill(-23.15,-23.812) Drill(-22.959,24.422) Drill(-22.775,-24.462) Drill(-7.25,-32.75) Drill(-7.25,-32) Drill(-7.25,32) Drill(-7.25,32.75) Drill(-6.5,-32.75) Drill(-6.5,-32) Drill(-6.5,32) Drill(-6.5,32.75) Drill(-5.75,-32.75) Drill(-5.75,-32) Drill(-4.5,32) Drill(-4.5,32.75) Drill(-3.75,-32.75) Drill(-3.75,-32) Drill(-3.75,32) Drill(-3.75,32.75) Drill(-3,-32.75) Drill(-3,-32) Drill(-2,32) Drill(-2,32.75) Drill(-1.25,-32.75) Drill(-1.25,-32) Drill(-1.25,32) Drill(-1.25,32.75) Drill(-0.5,-32.75) Drill(-0.5,-32) Drill(0.5,32) Drill(0.5,32.75) Drill(1.25,-32.75) Drill(1.25,-32) Drill(1.25,32) Drill(1.25,32.75) Drill(2,-32.75) Drill(2,-32) Drill(3,32) Drill(3,32.75) Drill(3.75,-32.75) Drill(3.75,-32) Drill(3.75,32) Drill(3.75,32.75) Drill(4.5,-32.75) Drill(4.5,-32) Drill(5.75,32) Drill(5.75,32.75) Drill(6.5,-32.75) Drill(6.5,-32) Drill(6.5,32) Drill(6.5,32.75) Drill(7.25,-32.75) Drill(7.25,-32) Drill(7.25,32) Drill(7.25,32.75) Drill(22.743,-24.42) Drill(22.765,24.567) Drill(23.118,-23.77) Drill(23.14,23.917) Drill(23.392,-24.795) Drill(23.415,24.942) Drill(23.493,-23.121) Drill(23.767,-24.145) Drill(23.79,24.292) Drill(24.14,22.185) Drill(24.142,-23.496) Drill(24.493,-21.389) Drill(24.515,21.536) Drill(24.79,22.56) Drill(24.868,-20.739) Drill(25.142,-21.764) Drill(25.165,21.911) Drill(25.39,20.02) Drill(25.517,-21.114) Drill(25.743,-19.224) Drill(25.765,19.371) Drill(26.04,20.395) Drill(26.118,-18.574) Drill(26.392,-19.599) Drill(26.415,19.746) Drill(26.64,17.855) Drill(26.767,-18.949) Drill(26.993,-17.059) Drill(27.015,17.206) Drill(27.29,18.23) Drill(27.368,-16.409) Drill(27.642,-17.434) Drill(27.665,17.581) Drill(27.89,15.69) Drill(28.017,-16.784) Drill(28.243,-14.894) Drill(28.265,15.04) Drill(28.54,16.065) Drill(28.618,-14.244) Drill(28.892,-15.269) Drill(28.915,15.415) Drill(29.265,13.308) Drill(29.267,-14.619) Drill(29.618,-12.512) Drill(29.64,12.659) Drill(29.915,13.683) Drill(29.993,-11.863) Drill(30.015,12.009) Drill(30.267,-12.887) Drill(30.29,13.034) Drill(30.642,-12.238) Drill(30.665,12.384)

## Via types
v1: diameter 0.7, hole 0.35, Top Layer to Bottom Layer, 410 vias
v2: diameter 0.5, hole 0.2, Top Layer to Bottom Layer, 36 vias
v3: diameter 2.7, hole 2.5, Top Layer to Bottom Layer, 12 vias
v4: diameter 1.27, hole 0.711, Top Layer to Bottom Layer, 6 vias

## Nets (pads, with @x,y where several pads share a name; then routed paths per layer and width w, separated by ;. In a path a pad name is that pad's centre, name@x,y a point inside that pad or via, vN(x,y) a via of type N, cw(c..) or ccw(c..) an arc to the next point about the centre after c; other vN are vias at no path point)
5V: C100.2 D1.1 D11.1 U1.3 | length 10.8
  Top Layer w0.4: D11.1@-18.76,12.925 D1.1@-16.75,12.925 -16.75,15.9 ; -16.65,16 -15.95,16.7 U1.3@-14.8,16.7 -14.8,15.49 -13.74,14.43 C100.2@-12.8,14.43